# Altium PCB Charger V3 PCB.PcbDoc
Units mil, origin at the board's own origin, x right, y up, seen from the top; angles counter-clockwise.
Board outline 1500 x 1500 mil, 2 copper layers (Top Layer, Bottom Layer); 20 components, 10 nets, 77 pads, 0 vias.
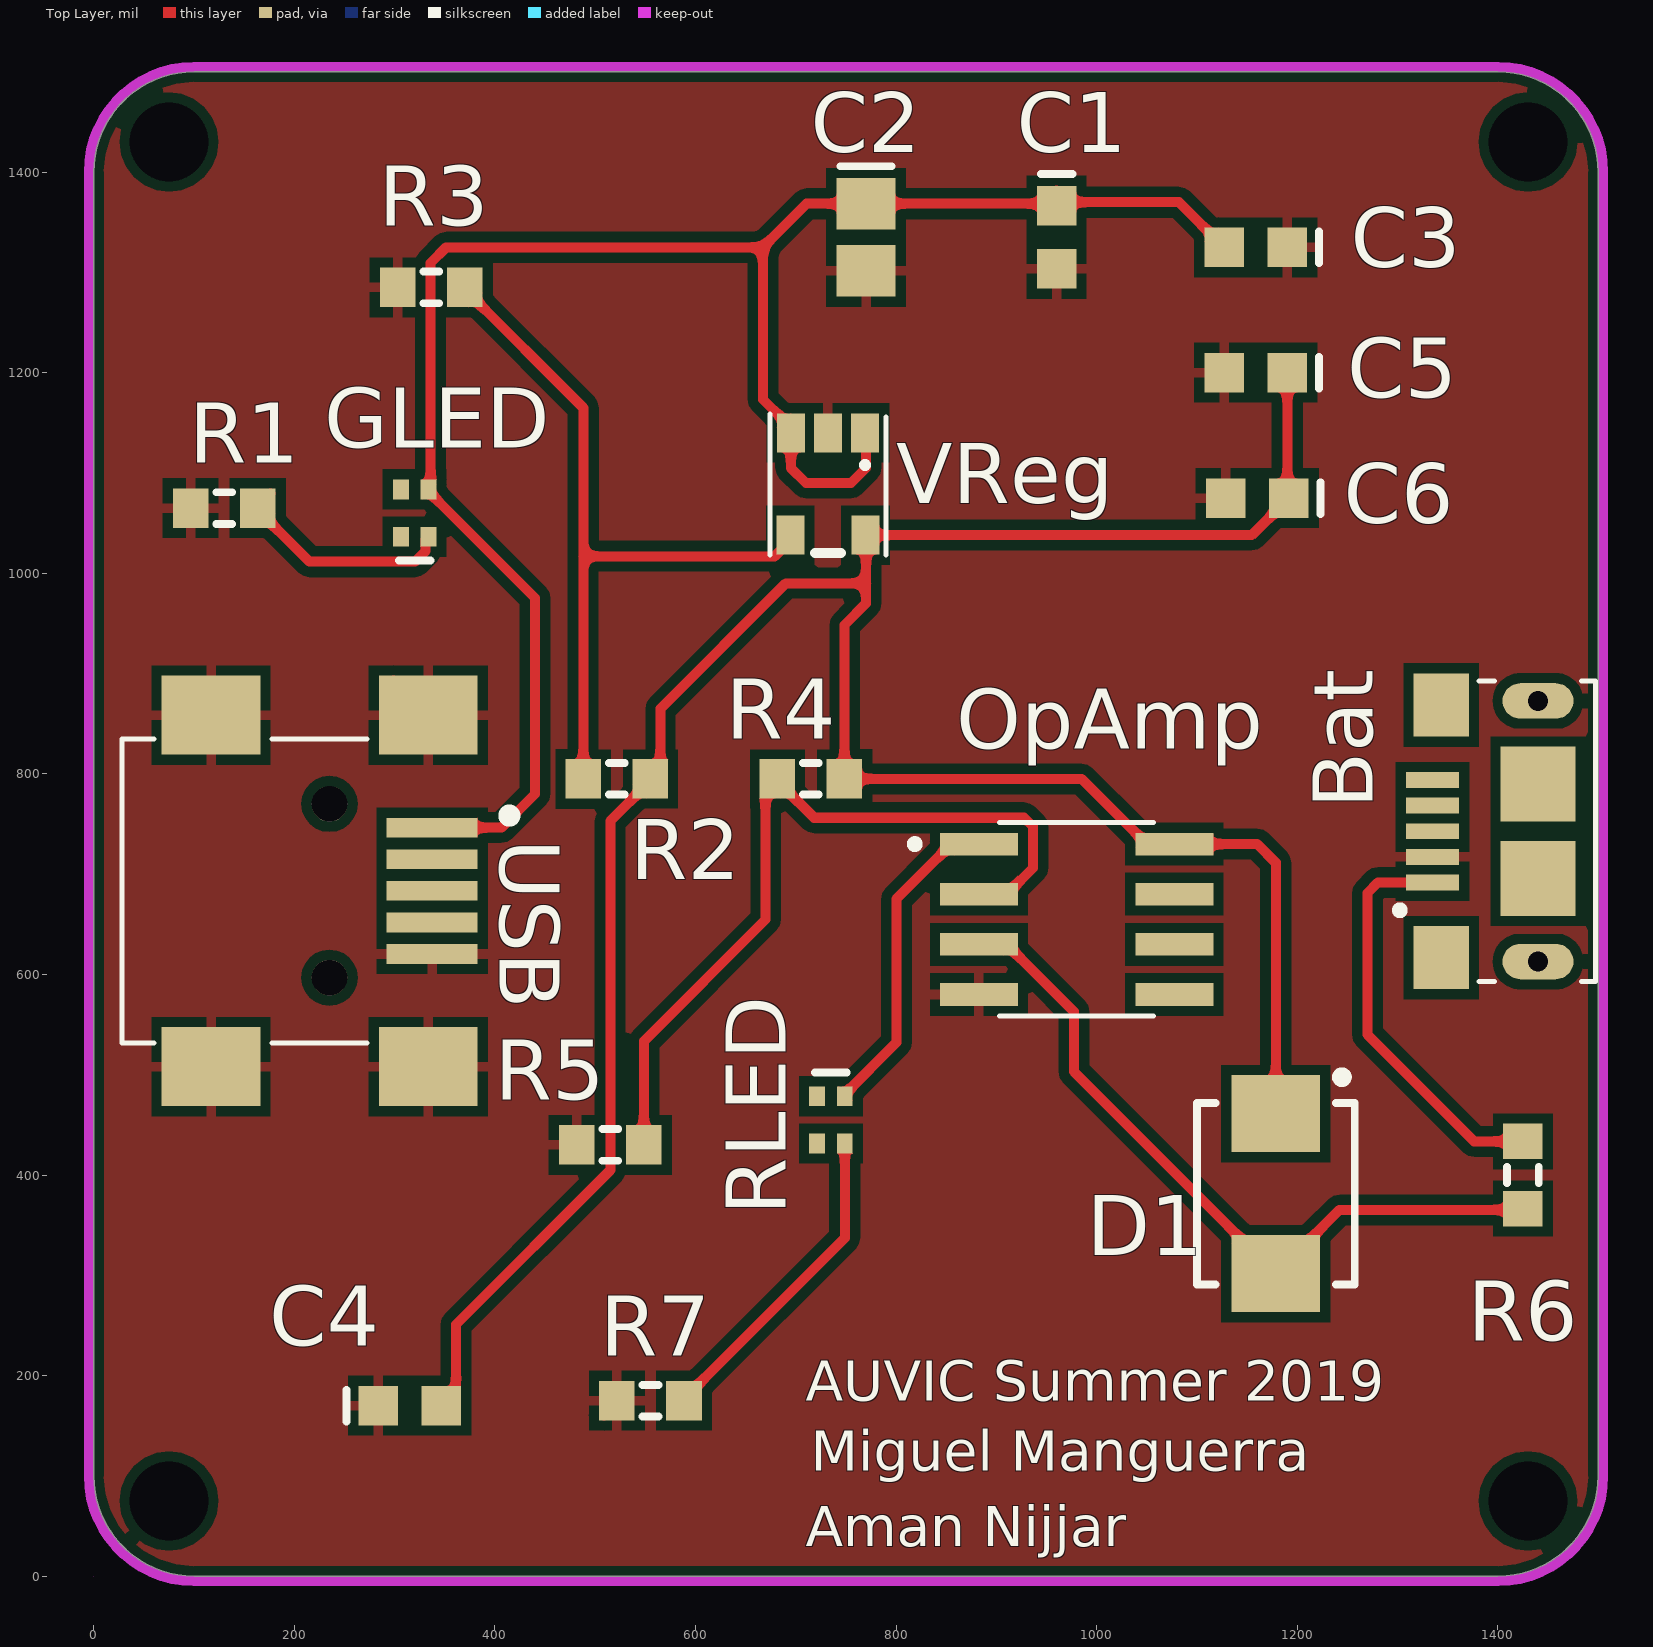
[diagram p0: Top Layer view]
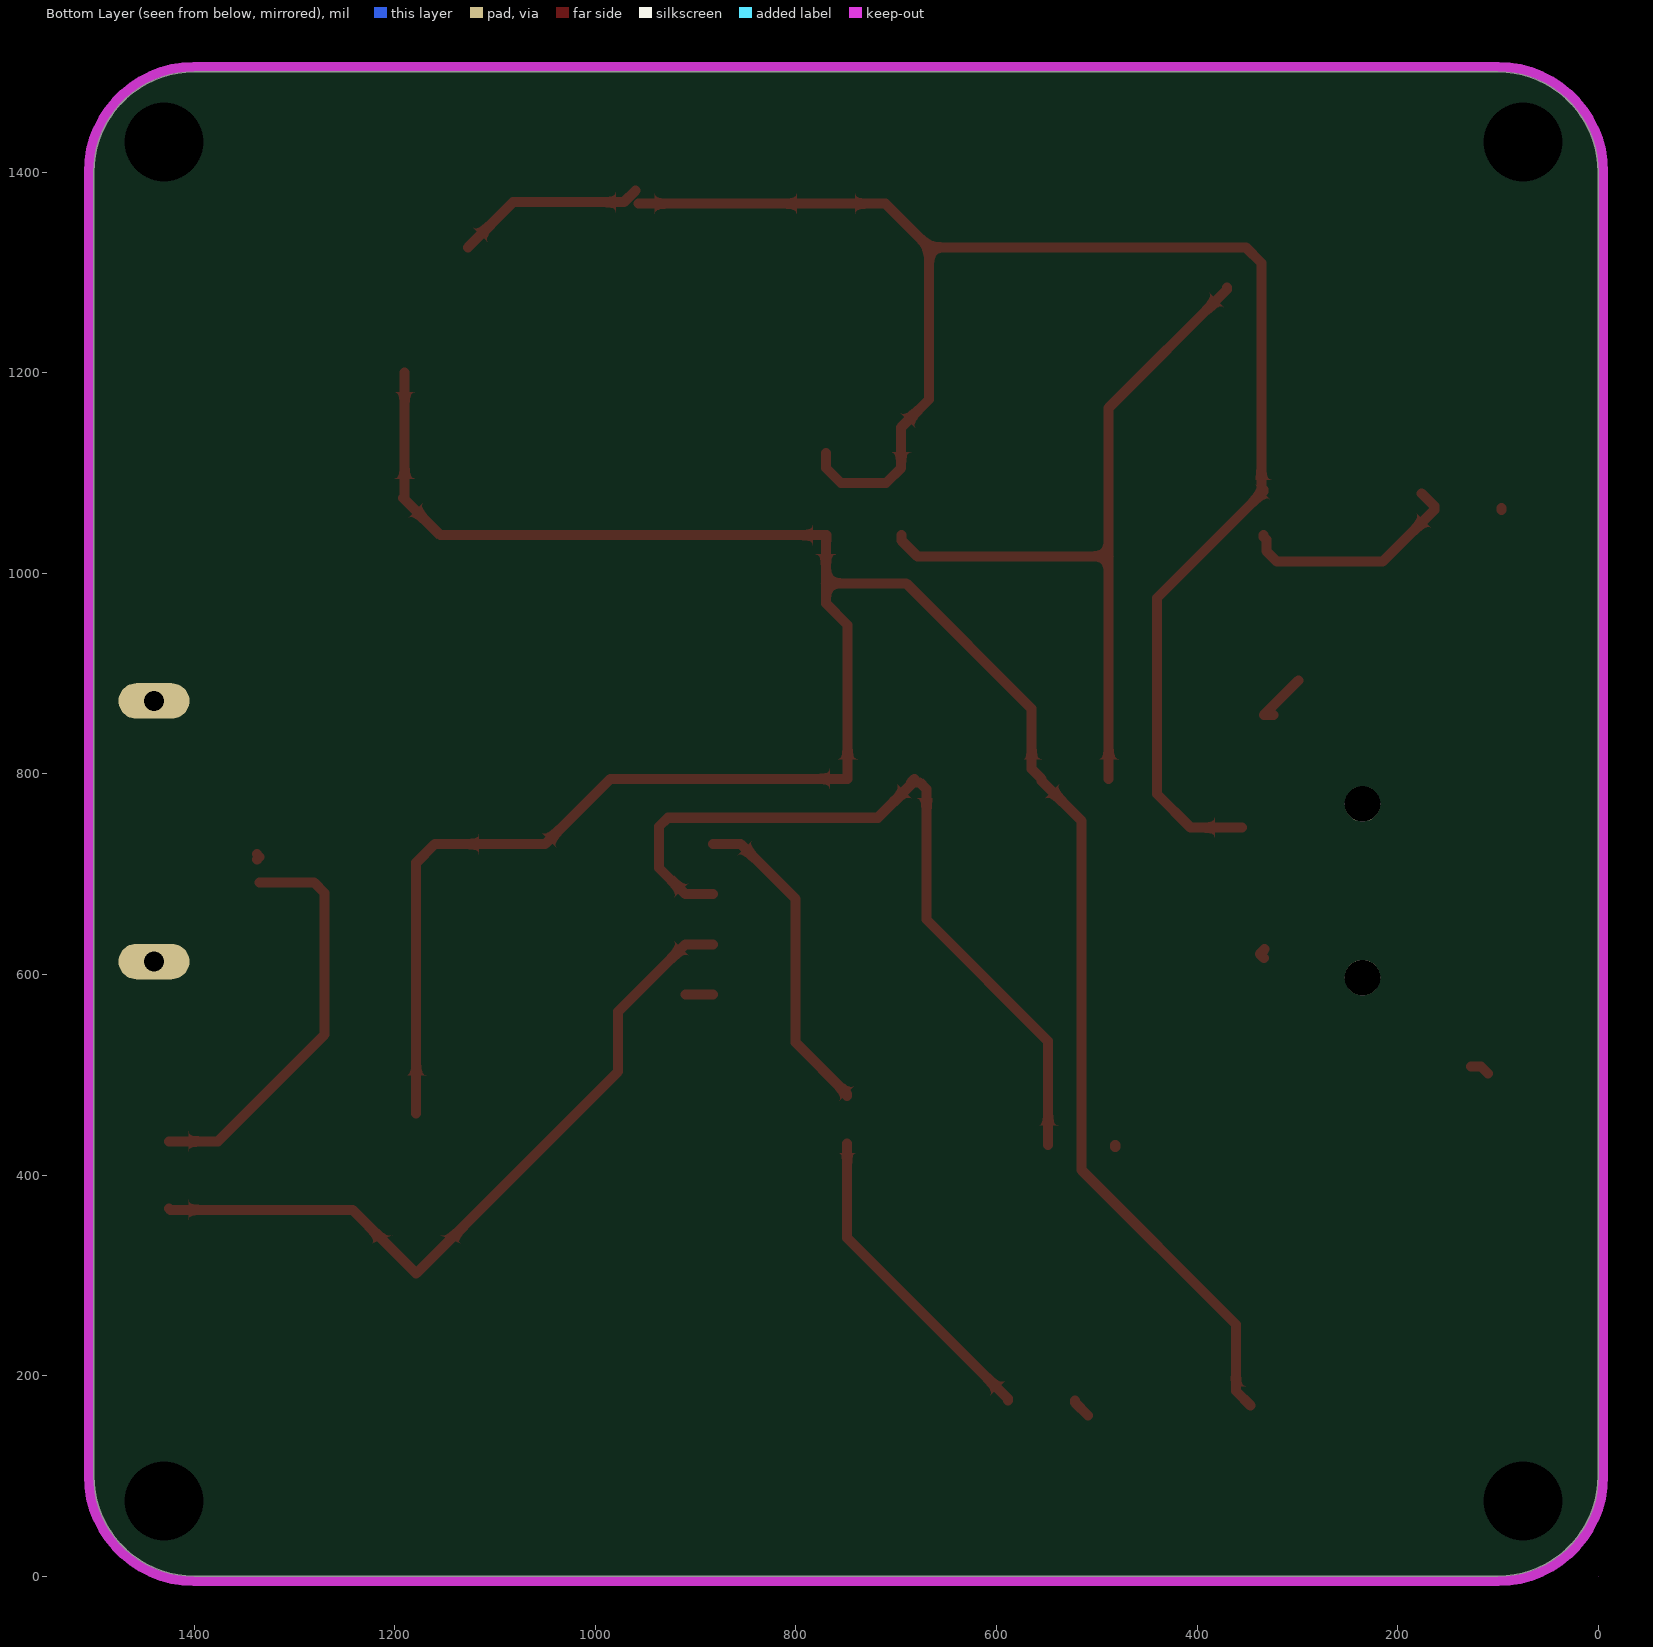
[diagram p1: Bottom Layer view, seen from below]
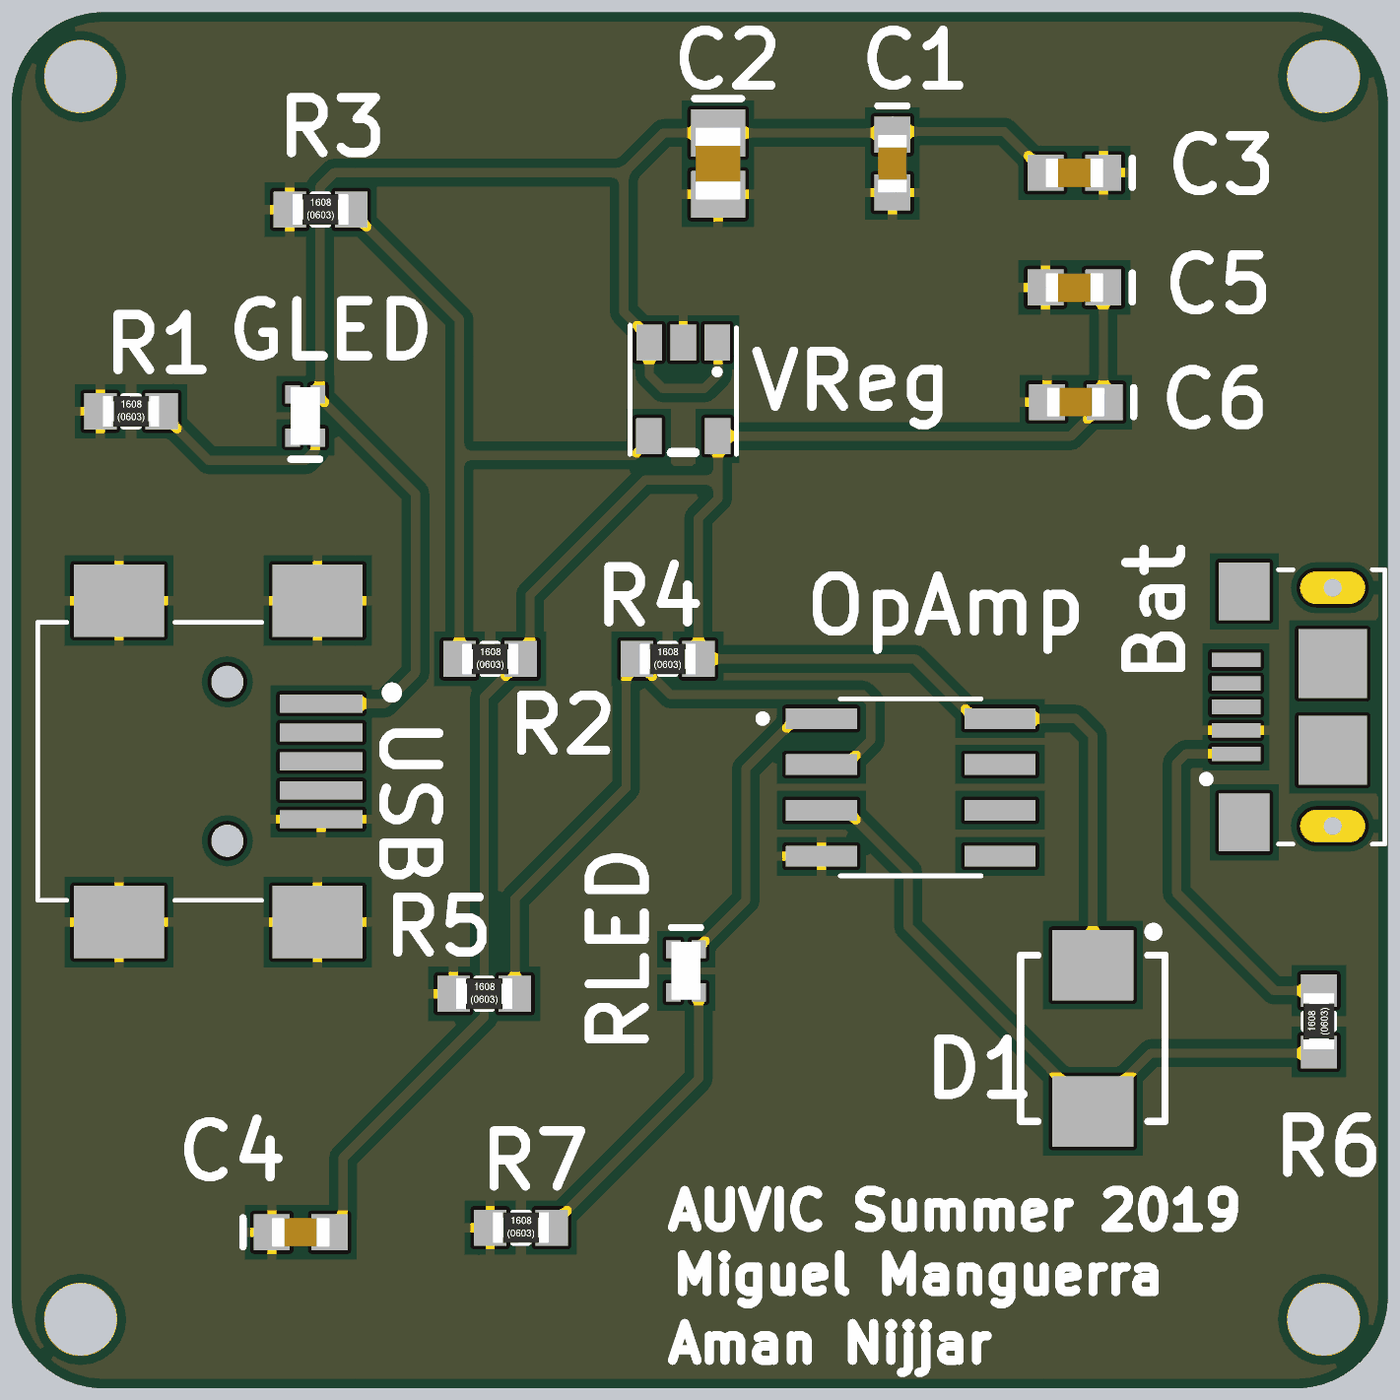
[diagram p2: 3D render of the assembled board from above, using the file's embedded part models]

## Layer stack, top to bottom
Top Solder: solder mask 0.4, Solder Resist, Dk 3.5
Top Layer: signal copper 1.4
Dielectric 1: dielectric 12.6, FR-4, Dk 4.8
Bottom Layer: signal copper 1.4
Bottom Solder: solder mask 0.4, Solder Resist, Dk 3.5

## Board outline
0,1400 cw(c100,1400) 100,1500 1400,1500 cw(c1400,1400) 1500,1400 1500,100 cw(c1400,100) 1400,0 100,0 cw(c100,100) 0,100
cut-out: 0,0

## Design rules (kind name [scope] priority, off if disabled: settings)
Clearance [All] p1: gap=10 ignorepadtopadclearanceinfootprint=TRUE except(0: Arc-Hole Track-Hole SMDPad-Hole THPad-Hole Via-Hole Fill-Hole Poly-Hole Region-Hole Text-Hole)
PolygonConnect [All] p1: connectstyle=Relief reliefconductorwidth=10 reliefentries=4 polygonreliefangle="90 Angle" airgapwidth=10
RoutingVias [All] p1: holewidth=28 width=50 viastyle="Through Hole" minholewidth=28 minwidth=50 maxholewidth=28 maxwidth=50
SolderMaskExpansion [All] p1: expansion=4
Width [All] p1: maxlimit=10 minlimit=10 preferedwidth=10
30 further rules are at their usual default settings.

## Components (designator, comment, footprint, x,y, rotation, side; value= is the part's Value field where it differs from the comment)
Bat "N-700AACF2 700mAh 2.4V" *FCI_10118193-0001LF_10118193-0001LF(Primary) 1440,742.76 r90 top (schematic designator Battery)
C1 "0.1μF" "CAPC1608N(0603\")" 960,1335 r270 top value=0.1µF
C2 "Cap" "CAPC2012N(0805\")" 770,1335 r270 top value=10uF
C3 "1μF" "CAPC1608N(0603\")" 1158.5,1325 r180 top value=1µF
C4 "1μF" "CAPC1608N(0603\")" 315,170 r0 top value=1µF
C5 "0.1μF" "CAPC1608N(0603\")" 1158.5,1200 r180 top value=0.1µF
C6 "0.1μF" "CAPC1608N(0603\")" 1160,1075 r180 top value=0.1µF
D1 "DA2S10400L, SOD323F / SC-90" SODFL535X110-2N 1178.52,381.46 r270 top
GLED "=Colour" LED0603_DUAL 320,1060 r270 top
OpAmp "LM358DT" *SOIC127P600X175-8N 980,655 r0 top
R1 "Res1" "RESC1608N(0603\")" 130,1065 r0 top value=1KO
R2 "Res2" "RESC1608N(0603\")" 521.54,795 r0 top value=100O
R3 "Res3" "RESC1608N(0603\")" 336.54,1285 r0 top value=36O
R4 "Res4" "RESC1608N(0603\")" 715,795 r0 top value=1K
R5 "Res5" "RESC1608N(0603\")" 515,430 r0 top value=10K
R6 "Res6" "RESC1608N(0603\")" 1425,400 r90 top value=50O
R7 "Res7" "RESC1608N(0603\")" 555,175 r0 top value=1KO
RLED "=Colour" LED0603_DUAL 735,455 r90 top
USB "1734035-3" *TE_1734035-3_1734035-3(Primary) 193.66,683.39 r270 top
VReg "Linear Regualtor" 621-AP2127K-1.2TRG1 732,1089 r180 top

## Footprints (in the part's own frame and the unit in brackets; to place one, negate y for a bottom-side part, rotate by r counter-clockwise, add the part's x,y. Pads: shape width x height; smd on the part's side, far side on the other; paste and mask are expansions set on the pad)
621-AP2127K-1.2TRG1 [mil] "SMT"
  rect 28x39 smd: 1(-37,-51) 2(0,-51) 3(37,-51) 4(37.5,51) 5(-37.5,51)
  silkscreen extent -58,-70 58,71
*FCI_10118193-0001LF_10118193-0001LF(Primary) [mm]
  rect 0.4x1.35 smd: 1(-1.3,2.675) 2(-0.65,2.675) 3(0,2.675) 4(0.65,2.675) 5(1.3,2.675)
  round 0.5 hole 0.5 unplated: None(-3.3,0) None(3.3,0)
  rect 1.6x1.4 smd: S1(-3.2,2.45) S2(3.2,2.45)
  rect 1.9x1.9 smd: S3(1.2,0) S4(-1.2,0)
  oval 0.9x1.8 hole 0.5: S5(-3.3,0) S6(3.3,0)
  silkscreen extent -3.8,-1.45 3.8,3.6
*SOIC127P600X175-8N [mm]
  rect 1.97x0.57 smd: 1(-2.475,1.905) 2(-2.475,0.635) 3(-2.475,-0.635) 4(-2.475,-1.905) 5(2.475,-1.905) 6(2.475,-0.635) 7(2.475,0.635) 8(2.475,1.905)
  silkscreen extent -4.2,-2.45 1.95,2.45
*TE_1734035-3_1734035-3(Primary) [mm]
  rect 0.5x2.3 smd: 1(-1.6,3.65) 2(-0.8,3.65) 3(0,3.65) 4(0.8,3.65) 5(1.6,3.65)
  round 0.9 hole 0.9 unplated: None(-2.2,1.05) None(2.2,1.05)
  rect 2x2.5 smd: SH1(4.45,3.55) SH2(4.45,-1.95) SH3(-4.45,-1.95) SH4(-4.45,3.55)
  silkscreen extent -3.85,-4.2 3.85,5.69
"CAPC1608N(0603\")" [mm] "Chip Capacitor, Body 1.6x0.8mm (0603\"), IPC Medium Density"
  rect 1x1 smd: 1(-0.8,0) 2(0.8,0)
  silkscreen extent -1.6,-0.4 -1.6,0.4, body extent -0.8,-0.4 0.8,0.4, height 0.9
"CAPC2012N(0805\")" [mm] "Chip Capacitor, Body 2.0x1.3mm (0805\"), IPC Medium Density"
  rect 1.3x1.5 smd: 1(-0.85,0) 2(0.85,0)
  silkscreen extent -1.8,-0.65 -1.8,0.65, body extent -1,-0.62 1,0.63, height 1
LED0603_DUAL [mm]
  rect 0.5x0.4 smd: 1(-0.6,0.35) 2(0.6,0.35) 3(-0.6,-0.35) 4(0.6,-0.35)
  silkscreen extent 1.2,-0.4 1.2,0.4, body extent -0.8,-0.4 0.8,0.4, height 0.49
"RESC1608N(0603\")" [mm] "Chip Resistor, Body 1.6x0.8mm (0603\"), IPC Medium Density"
  rect 0.9x1 smd: 1(-0.85,0) 2(0.85,0)
  silkscreen extent -0.2,-0.4 0.2,0.4, body extent -0.77,-0.42 0.78,0.43, height 0.44
SODFL535X110-2N [mm] "SODFL, 2-Leads, Body 3.63x5.35mm, IPC Medium Density"
  rect 1.95x2.25 smd: 1(-2.025,0) 2(2.025,0)
  silkscreen extent -3.07,-2 2.3,2, body extent -2.3,-1.97 2.3,1.97, height 1.1

## Part data
Bat: library part Battery, "Multicell Battery", LatestRevisionDate=17-Jul-2002, LatestRevisionNote="Re-released for DXP Platform.", PackageDescription="Battery; 2 Leads", PackageReference=BAT-2, Published=24-Mar-1999, Publisher="Altium Limited"
C1 C5 C6: library part "0.1uF 16V 0603 SMD, Ceramic", "Capacitor, Ceramic, 16V, +/- 10%, 0603 SMD, X7R", Supplier Part Number 1=1276-1005-1-ND, Created By="Andy Bates", PackageDescription="Chip Capacitor", Published=16-04-26, Publisher=AUVic, Supplier 1=Digi-Key
C2: "Capacitor", LatestRevisionDate=17-Jul-2002, LatestRevisionNote="Re-released for DXP Platform.", PackageDescription="Radial Cap, Thru-Hole; 2 Leads; 0.3 in Pin Spacing", PackageReference=RAD-0.3, Published=8-Jun-2000, Publisher="Altium Limited"
C3 C4: library part "1uF 25V 0603 SMD, Ceramic", "Capacitor, Ceramic, 25V, +/- 10%, 0603 SMD, X5R", Supplier Part Number 1=490-3897-1-ND, Created By="Andy Bates", MFG=Murata-Electronics-North-America, MFG#=GRM188R61E105KA12D, PackageDescription="Chip Capacitor", Published=16-06-27, Publisher=AUVic, Supplier 1=Digi-Key
D1: Forward Voltage Drop=1.1V, Supplier Part Number 1=P15187CT-ND, Created By="Andy Bates", Date Created=2016-09-08, Publisher=AUVic, Supplier 1=Digi-Key
GLED RLED: library part "LED, 0603 (1608), Red/Green, Clear", "LED, 0603 (1608), Red/Green, Clear", Colour 1=Red, Colour 2=Green, Supplier Part Number 1=754-1955-1-ND, Created By="Ashwin Sira", Supplier 1=Digi-Key
OpAmp: "LM358 Series 30 V 1.1 MHz Low Power Dual Operational Amplifier - SOIC-8", Package="SOIC-8 STMicroelectronics", Availability=Unavailable, MF=STMicroelectronics, MP=LM358DT, Price=None, SnapEDA_Link=https://www.snapeda.com/parts/LM358DT/STMicroelectronics/view-part/?ref=snap
R1: "Resistor", LatestRevisionDate=17-Jul-2002, LatestRevisionNote="Re-released for DXP Platform.", PackageDescription="Axial Device, Thru-Hole; 2 Leads; 0.3 in Pin Spacing", PackageReference=AXIAL-0.3, Published=8-Jun-2000, Publisher="Altium Limited"
R2 R3 R4 R5 R6 R7: library part Res1, "Resistor", LatestRevisionDate=17-Jul-2002, LatestRevisionNote="Re-released for DXP Platform.", PackageDescription="Axial Device, Thru-Hole; 2 Leads; 0.3 in Pin Spacing", PackageReference=AXIAL-0.3, Published=8-Jun-2000, Publisher="Altium Limited"
USB: "Conn Mini USB 2.0 Type B RCP 5 POS 0.8mm Solder RA SMD 5 Terminal 1 Port T/R", Package=None, Availability=Unavailable, EU_RoHS_Compliance=Compliant, MF="TE Connectivity", MP=1734035-3, Price=None, SnapEDA_Link=https://www.snapeda.com/parts/1734035-3/TE%20Connectivity%20AMP%20Connectors/view-part/?ref=snap, TE_purchase_URL=https://www.te.com/usa-en/product-1734035-3.html?te_bu=Cor&te_type=disp&te_campaign=seda_glo_cor-seda-global-disp-prtnr-fy19-seda-model-bom-cta_sma-317_1&elqCampaignId=32493
VReg: Supplier Part Number 1=621-AP2127K-1.2TRG1, Supplier 1=Mouser

## Free pads (board coordinates)
  round 60 hole 78.74: 3(1430,75) 4(1430,1430) 5(75,1430) 6(75,75)

## Nets (pads, with @x,y where several pads share a name; then routed paths per layer and width w, separated by ;. In a path a pad name is that pad's centre, name@x,y a point inside that pad or via, vN(x,y) a via of type N, cw(c..) or ccw(c..) an arc to the next point about the centre after c; other vN are vias at no path point)
GND: Bat.2 C1.2 C2.2 C3.1 C4.1 C5.2 C6.2 OpAmp.4 R1.1 R3.1 R5.1 R7.1 USB.5 USB.SH1 USB.SH2 USB.SH3 USB.SH4 VReg.2 | length 149.6
  Top Layer w10: R1.1@96.54,1063.03 R1.1 ; USB.SH2@110,501.3 USB.SH2 USB.SH2@126.73,508.19 ; USB.SH4@299.06,892.95 USB.SH4 USB.SH4@323.58,858.58 ; USB.5@332.52,625.24 USB.5 USB.5@333.43,616.46 ; R5.1@481.54,428.03 R5.1 ; R7.1@508.82,160.31 521.54,173.03 R7.1 ; OpAmp.4 OpAmp.4@910.12,580 ; Bat.2@1337.4,714.45 Bat.2 Bat.2@1337.4,719.88
NetBat_1: Bat.1 R6.2 | length 409.6
  Top Layer w10: Bat.1 1280.22,691.57 1269.92,681.28 1269.92,539.9 1376.36,433.46 R6.2
NetC4_2: C4.2 C5.1 C6.1 D1.1 OpAmp.8 R2.2 R4.2 VReg.5 | length 2577.8
  Top Layer w10: C4.2 361.18,184.69 361.18,251.03 515,404.85 515,753.03 555,793.03 R2.2 565,805 565,865 690,990 770,990 ; VReg.5@769.5,1032.5 VReg.5 ; D1.1 1178.52,711.48 1160,730 OpAmp.8 1049.88,730 984.88,795 R4.2 748.46,948.46 770,970 770,990 ; C5.1 1190,1076.5 C6.1 1154.5,1038 VReg.5 ; VReg.5 770,1037.5 770,990
NetD1_2: D1.2 OpAmp.3 R6.1 | length 740.3
  Top Layer w10: OpAmp.3 910.12,630 977.22,562.9 977.22,503.04 D1.2 1242.06,365.28 1423.74,365.28 R6.1
NetGLED_2: GLED.2 R1.2 | length 232.5
  Top Layer w10: R1.2@176.18,1079.69 163.46,1066.97 R1.2 163.46,1063.03 214.96,1011.54 320.31,1011.54 330.91,1022.13 330.91,1033.5 GLED.2 GLED.2@333.78,1038.35
NetOpAmp_1: OpAmp.1 RLED.4 | length 322.9
  Top Layer w10: RLED.4 748.78,480.59 800.22,532.03 800.22,675.22 855,730 OpAmp.1
NetOpAmp_2: OpAmp.2 R4.1 R5.2 | length 802.6
  Top Layer w10: R5.2 548.46,533.46 669.71,654.71 669.71,784.71 676.54,791.54 685,791.54 R4.1 ; R4.1@685,789.57 718.35,756.22 927.55,756.22 936.34,747.43 936.34,706.22 910.12,680 OpAmp.2
NetR2_1: R2.1 R3.2 VReg.4 | length 757.3
  Top Layer w10: R3.2 370,1283.03 488.07,1164.96 488.07,1016.93 ; R2.1 488.07,1016.93 ; VReg.4 694.5,1032.5 678.93,1016.93 488.07,1016.93
NetR7_2: R7.2 RLED.3 | length 322.8
  Top Layer w10: R7.2 588.46,176.97 748.78,337.28 RLED.3
VCC: C1.1 C2.1 C3.2 GLED.1 USB.1 VReg.1 VReg.3 | length 1843.1
  Top Layer w10: USB.1@355.08,746.38 406.38,746.38 440,780 440,975.43 333.78,1081.65 GLED.1 335.79,1085.63 335.79,1309.4 351.39,1325 667.13,1325 ; 770,1120 770,1105 755,1090 710,1090 695,1105 VReg.3 695,1145.5 667.13,1173.37 667.13,1325 ; C1.1@956.97,1368.46 C2.1 710.6,1368.46 667.13,1325 ; C1.1@960,1381.5 971.5,1370 1082.01,1370 C3.2
pads on no net: Bat.3 Bat.4 Bat.5 Bat.None Bat.S1 Bat.S2 Bat.S3 Bat.S4 Bat.S5 Bat.S6 GLED.3 GLED.4 OpAmp.5 OpAmp.6 OpAmp.7 RLED.1 RLED.2 USB.2 USB.3 USB.4 USB.None

## Polygon pours and split planes (outlines as drawn)
GND on Top Layer "Top Layer-GND" (solid, pour order 8): 0,1400 cw(c100,1400) 100,1500 1400,1500 cw(c1400,1400) 1500,1400 1500,100 cw(c1400,100) 1400,0 100,0 cw(c100,100) 0,100
no net on Top Layer "Top Layer-No Net 1" (solid, pour order 10): -270,1025
no net on Top Layer "Top Layer-No Net" (solid, pour order 6): -325,1360

## Keep-outs
Keep-Out Layer:
  lines w10: -5,100 ccw(c100,100) 100,-5 1400,-5 ccw(c1400,100) 1505,100 1505,1400 ccw(c1400,1400) 1400,1505 100,1505 ccw(c100,1400) -5,1400 -5,100

## Silkscreen, mask and mechanical layers (free items; w line width, h text height)
Top Overlay:
  text "AUVIC Summer 2019" at 710,175 h40
  text "Miguel Manguerra" at 715,105 h40
  text "Aman Nijjar" at 710,30 h40

## Text inside footprints (layer, text, board x,y; h text height)
Bat: Mechanical 4 "PCB END" at 1501.02,929.76 h73.82 r90; Mechanical 4 "PCB END" at 1501.02,929.76 h73.82 r90
USB: Mechanical 13 "PCB EDGE" at 22.39,750.32 h73.82 r270; Mechanical 13 "PCB EDGE" at 22.39,750.32 h73.82 r270